# Altium PCB FingerprintLock.pcbdoc
Units mil, origin at the board's own origin, x right, y up, seen from the top; angles counter-clockwise.
Board outline 5450 x 3385 mil, 2 copper layers (Top Layer, Bottom Layer); 60 components, 58 nets, 310 pads, 332 vias.
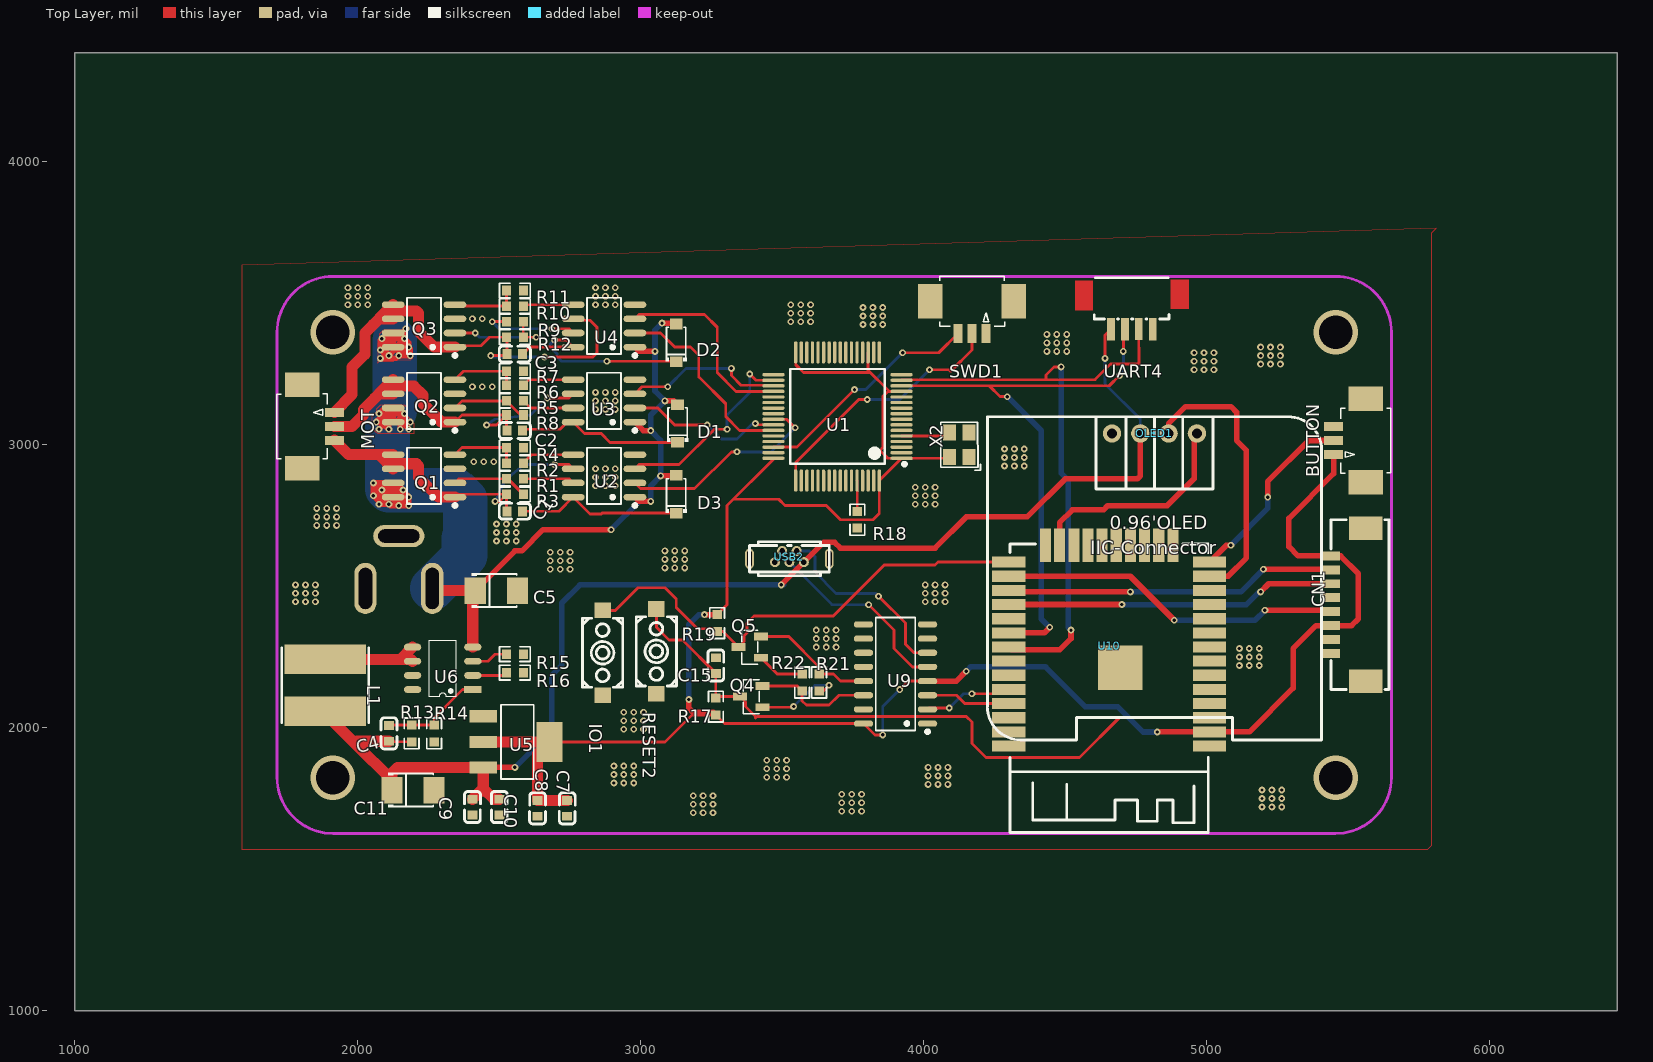
[diagram p0: Top Layer view]
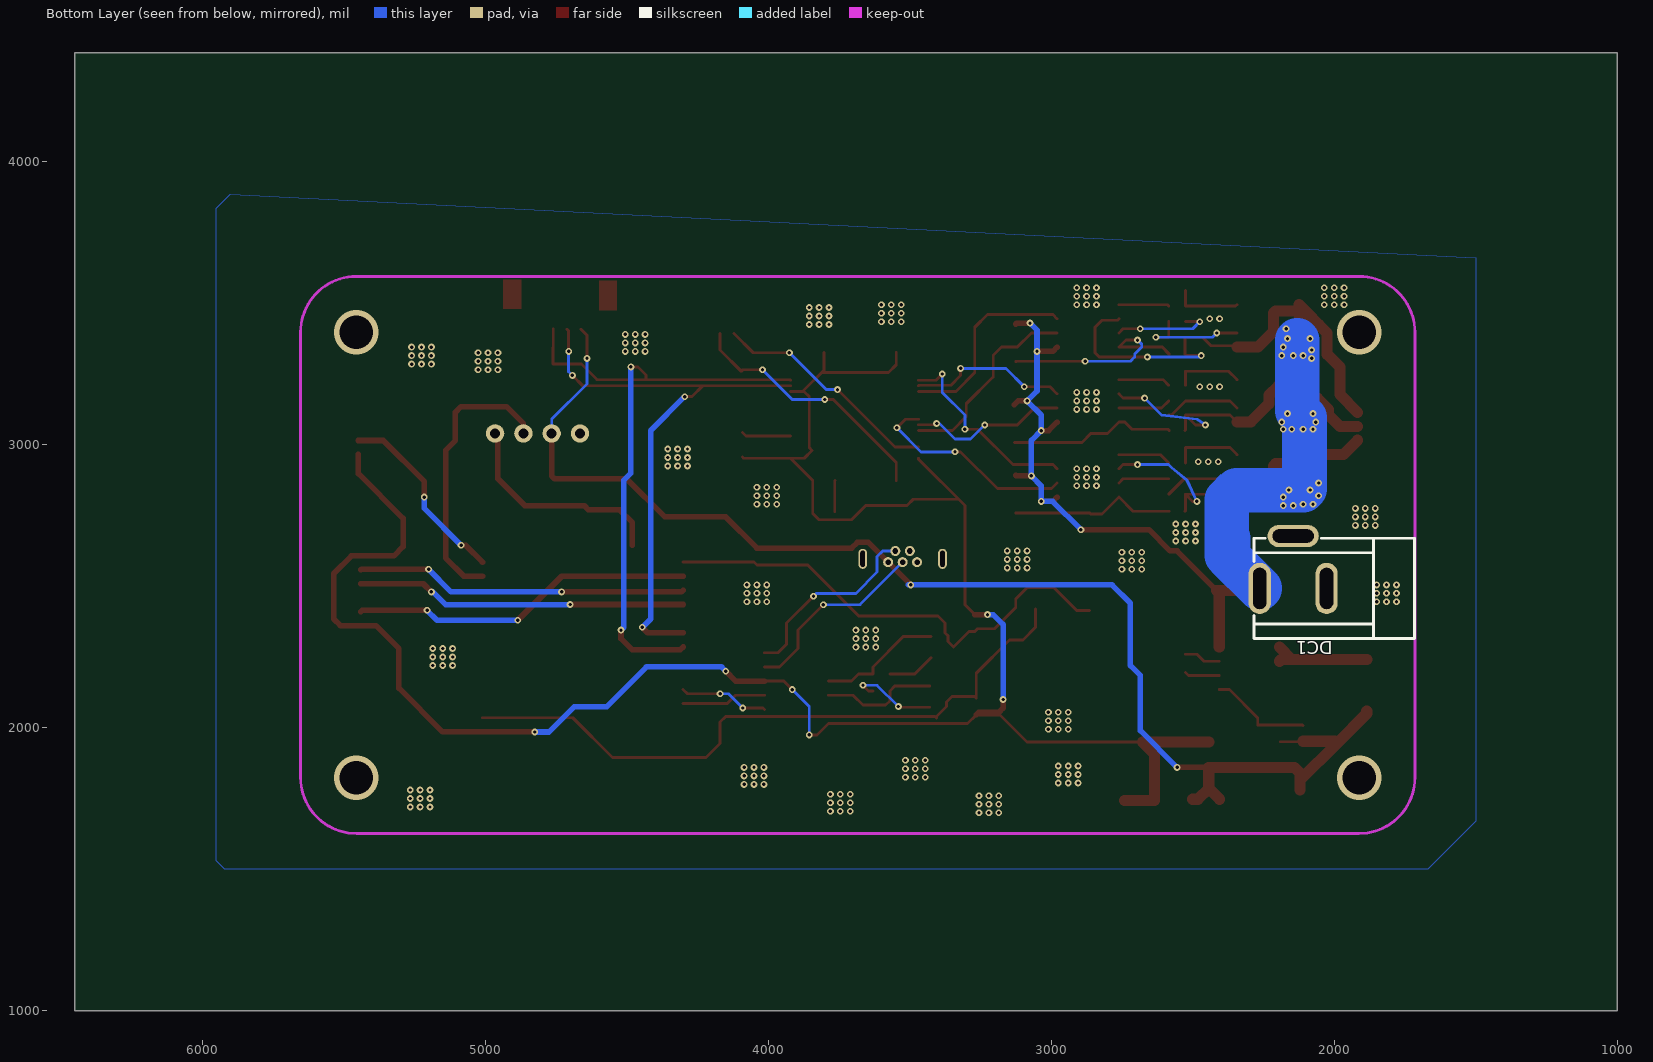
[diagram p1: Bottom Layer view, seen from below]

## Layer stack, top to bottom
Top Layer: signal copper (thickness not stored)
Dielectric: dielectric 12.6, FR-4, Dk 4.8
Bottom Layer: signal copper (thickness not stored)

## Board outline
6450,1000 1000,1000 1000,4385 6450,4385

## Components (designator, comment, footprint, x,y, rotation, side; value= is the part's Value field where it differs from the comment)
BUTTON "1.25T-3PWT" CONN-SMD_3P-P1.25_1.25T-3PWT 5505,3015 r270 top
C1 "22u" C0603 2555,2765 r0 top
C2 "22u" C0603 2555,3050 r0 top
C3 "22u" C0603 2555,3320 r0 top
C4 "200p" C0603 2110,1980 r270 top
C5 "100uF" CAP-SMD_L3.5-W2.8-R-RD 2490,2485 r180 top
C7 "22u" C0603 2740,1715 r270 top
C8 "0.1u" C0603 2635,1715 r270 top
C9 "22u" C0603 2405,1720 r270 top
C10 "0.1u" C0603 2500,1720 r270 top
C11 "220uF" CAP-SMD_L3.5-W2.8-R-RD 2195,1780 r180 top
C15 "1uf" C0603 3265,2220 r270 top
CN1 "1.25T-8P-WT_C2689920" CONN-SMD_1.25T-8P-WT_C2689920 5500,2435 r90 top
D1 "SS14D1F" SOD-123_L2.8-W1.8-LS3.7-RD 3130,3075 r90 top
D2 "SS14D1F" SOD-123_L2.8-W1.8-LS3.7-RD 3125,3360 r90 top
D3 "SS14D1F" SOD-123_L2.8-W1.8-LS3.7-RD 3125,2825 r90 top
DC1 "DC005-T" DC-IN-TH_DC005-T 2145,2585 r180 bottom
IO1 "K2-3.6×6.1_SMD" KEY-SMD_2P-L6.2-W3.6-LS8.0 2865,2265 r270 top
L1 "47uH" IND-SMD_L6.7-W6.7 1885,2150 r270 top
MOT "1.25T-3PWT" CONN-SMD_3P-P1.25_1.25T-3PWT 1860,3065 r90 top
OLED1 "0.96OLED_4P" 0.96OLED_4P 4815,3040 r0 top
Q1 "IRF7351TRPBF" SOIC-8_L4.9-W3.9-P1.27-LS6.0-BL 2234.03,2890 r90 top
Q2 "IRF7351TRPBF" SOIC-8_L4.9-W3.9-P1.27-LS6.0-BL 2234.03,3155 r90 top
Q3 "IRF7351TRPBF" SOIC-8_L4.9-W3.9-P1.27-LS6.0-BL 2234.03,3420 r90 top
Q4 "MMUN2233LT1G" SOT-23-3_L2.9-W1.3-P1.90-LS2.4-BR 3390,2110 r0 top
Q5 "MMUN2233LT1G" SOT-23-3_L2.9-W1.3-P1.90-LS2.4-BR 3385,2285 r0 top
R1 "7.5" R0603 2555,2880 r180 top
R2 "7.5" R0603 2555,2935 r180 top
R3 "10k" R0603 2555,2825 r180 top
R4 "10k" R0603 2555,2990 r180 top
R5 "7.5" R0603 2555,3155 r180 top
R6 "7.5" R0603 2555,3210 r180 top
R7 "10k" R0603 2555,3260 r180 top
R8 "10k" R0603 2555,3105 r180 top
R9 "7.5" R0603 2555,3435 r0 top
R10 "7.5" R0603 2555,3490 r180 top
R11 "10k" R0603 2555,3545 r180 top
R12 "10k" R0603 2555,3380 r180 top
R13 "470k" R0603 2190,1980 r270 top
R14 "150k" R0603 2270,1980 r90 top
R15 "62k" R0603 2555,2260 r180 top
R16 "130k" R0603 2555,2195 r180 top
R17 "1k" R0603 3265,2075 r90 top
R18 "1k" R0603 3765,2735 r90 top
R19 "1k" R0603 3270,2370 r90 top
R21 "10K" R0603 3630,2160 r270 top
R22 "10K" R0603 3570,2160 r90 top
RESET2 "K2-3.6×6.1_SMD" KEY-SMD_2P-L6.2-W3.6-LS8.0 3055,2270 r270 top
SWD1 "1.25T-3PWT" CONN-SMD_3P-P1.25_1.25T-3PWT 4170,3450 r0 top
U1 "STM32F405RGT6" LQFP-64_L10.0-W10.0-P0.50-LS12.0-BL 3695,3100 r90 top
U2 "IR2108STRPBF" SOIC-8_L4.9-W3.9-P1.27-LS6.0-BL 2870,2890 r90 top
U3 "IR2108STRPBF" SOIC-8_L4.9-W3.9-P1.27-LS6.0-BL 2870,3155 r90 top
U4 "IR2108STRPBF" SOIC-8_L4.9-W3.9-P1.27-LS6.0-BL 2870,3420 r90 top
U5 "AMS1117-3.3" SOT-223-3_L6.5-W3.4-P2.30-LS7.0-BR 2560,1950 r180 top
U6 "HX1314G" SOP8 2300,2210 r90 top
U9 "CH340C" SOP-16_L10.0-W3.9-P1.27-LS6.0-BL 3900,2190 r90 top
U10 "ESP32-S" WIRELM-SMD_ESP32-S 4655,2290 r180 top
UART4 "1.25T-4P-WT" CONN-SMD_4P-1.25P_1.25T-4P 4735,3470 r0 top
USB2 "U-D-M5DD-W-1" MICRO-USB-TH_MICRO-USB-A14 3525,2605 r180 top
X2 "8MHz" OSC-SMD_4P-L3.2-W2.5-BL 4125,3000 r90 top

## Footprints (in the part's own frame and the unit in brackets; to place one, negate y for a bottom-side part, rotate by r counter-clockwise, add the part's x,y. Pads: shape width x height; smd on the part's side, far side on the other; paste and mask are expansions set on the pad)
0.96OLED_4P [mm]
  round 1.65 hole 0.89: 1(-3.81,-0.001) 2(-1.27,0.002) 3(1.27,0.002) 4(3.81,0.002)
  silkscreen extent -15,-27.5 15,1.5
C0603 [mm]
  rect 0.8x0.9 smd: 1(-0.7,0) 2(0.7,0)
  silkscreen extent -1.41,-0.71 1.39,0.72
CAP-SMD_L3.5-W2.8-R-RD [mm]
  rect 1.9x2.376 smd: 1(1.899,0) 2(-1.899,0)
  silkscreen extent -1.83,-1.55 2.21,1.55
CONN-SMD_1.25T-8P-WT_C2689920 [mm]
  rect 0.8x1.6 smd: 1(4.375,1.55) 2(3.125,1.55) 3(1.875,1.55) 4(0.625,1.55) 5(-0.625,1.55) 6(-1.875,1.55) 7(-3.125,1.55) 8(-4.375,1.55)
  rect 2.1x3 smd: 9(-6.875,-1.55) 10(6.875,-1.55)
  silkscreen extent -7.62,-3.65 7.63,1.55
CONN-SMD_3P-P1.25_1.25T-3PWT [mm]
  rect 0.8x1.7 smd: 1(1.25,-1.45) 2(0,-1.45) 3(-1.25,-1.45)
  rect 2.2x3.1 smd: 4(-3.75,1.45) 5(3.75,1.45)
  silkscreen extent -2.9,-0.81 2.94,3.7
CONN-SMD_4P-1.25P_1.25T-4P [mm]
  rect 0.7x2 smd: 1(-1.875,-1.571) 2(-0.625,-1.571) 3(0.625,-1.556) 4(1.875,-1.574)
  round 0 smd: 5(4.3,1.574) 6(-4.3,1.463)
  Top Layer region: 5.1,0.264 3.5,0.264 3.5,2.884 5.1,2.884
  Top Layer region: -5.1,2.773 -3.5,2.773 -3.5,0.153 -5.1,0.153
  silkscreen extent -3.37,-0.64 3.34,3.06
DC-IN-TH_DC005-T [mm]
  oval 2x4.6 hole 1.2 slot 3.7 at 90 deg: 1(-3,-2.35) 2(3,-2.35)
  oval 4.6x2 hole 1.2 slot 3.7 at 0 deg: 3(0,2.35)
  silkscreen extent -3.5,-6.85 10.9,2.15
IND-SMD_L6.7-W6.7 [mm]
  rect 2.65x7.3 smd: 1(-2.325,0) 2(2.325,0)
  silkscreen extent -3.35,-3.9 3.35,3.9
KEY-SMD_2P-L6.2-W3.6-LS8.0 [mm]
  rect 1.4x1.5 smd: 1(-3.8,0) 2(3.8,0)
  silkscreen extent -3.1,-1.8 3.1,1.8
LQFP-64_L10.0-W10.0-P0.50-LS12.0-BL [mm]
  oval 0.3x2 smd: 1(-3.75,-5.75) 2(-3.25,-5.75) 3(-2.75,-5.75) 4(-2.25,-5.75) 5(-1.75,-5.75) 6(-1.25,-5.75) 7(-0.75,-5.75) 8(-0.25,-5.75) 9(0.25,-5.75) 10(0.75,-5.75) 11(1.25,-5.75) 12(1.75,-5.75) 13(2.25,-5.75) 14(2.75,-5.75) 15(3.25,-5.75) 16(3.75,-5.75) 33(3.75,5.75) 34(3.25,5.75) 35(2.75,5.75) 36(2.25,5.75) 37(1.75,5.75) 38(1.25,5.75) 39(0.75,5.75) 40(0.25,5.75) 41(-0.25,5.75) 42(-0.75,5.75) 43(-1.25,5.75) 44(-1.75,5.75) 45(-2.25,5.75) 46(-2.75,5.75) 47(-3.25,5.75) 48(-3.75,5.75)
  oval 2x0.3 smd: 17(5.75,-3.75) 18(5.75,-3.25) 19(5.75,-2.75) 20(5.75,-2.25) 21(5.75,-1.75) 22(5.75,-1.25) 23(5.75,-0.75) 24(5.75,-0.25) 25(5.75,0.25) 26(5.75,0.75) 27(5.75,1.25) 28(5.75,1.75) 29(5.75,2.25) 30(5.75,2.75) 31(5.75,3.25) 32(5.75,3.75) 49(-5.75,3.75) 50(-5.75,3.25) 51(-5.75,2.75) 52(-5.75,2.25) 53(-5.75,1.75) 54(-5.75,1.25) 55(-5.75,0.75) 56(-5.75,0.25) 57(-5.75,-0.25) 58(-5.75,-0.75) 59(-5.75,-1.25) 60(-5.75,-1.75) 61(-5.75,-2.25) 62(-5.75,-2.75) 63(-5.75,-3.25) 64(-5.75,-3.75)
  silkscreen extent -4.43,-6.16 4.25,4.25
MICRO-USB-TH_MICRO-USB-A14 [mm]
  round 0.9 hole 0.5: 1(-1.3,0.5) 2(-0.65,-0.5) 3(0,0.5) 4(0.65,-0.5) 5(1.3,0.5)
  oval 0.8x1.8 hole 0.4 slot 1.45 at 90 deg: 6(-3.58,0.201) 7(3.58,0.201)
  silkscreen extent -3.58,-1.32 3.58,1.72
OSC-SMD_4P-L3.2-W2.5-BL [mm]
  rect 1.4x1.2 smd: 1(-1.1,-0.875) 2(1.1,-0.875) 3(1.1,0.875) 4(-1.1,0.875)
  silkscreen extent -2.29,-1.9 2.03,1.65
R0603 [mil]
  rect 31.75x34.02 smd: 1(-29.66,0) 2(29.66,0)
  silkscreen extent -55,-26 55,26
SOD-123_L2.8-W1.8-LS3.7-RD [mm]
  rect 0.95x1.15 smd: 1(-1.693,0) 2(1.693,0)
  silkscreen extent -1.63,-0.94 1.41,0.94
SOIC-8_L4.9-W3.9-P1.27-LS6.0-BL [mm]
  oval 0.588x2.045 smd: 1(-1.905,-2.773) 2(-0.635,-2.773) 3(0.635,-2.773) 4(1.905,-2.773) 5(1.905,2.773) 6(0.635,2.773) 7(-0.635,2.773) 8(-1.905,2.773)
  silkscreen extent -2.8,-2.92 2.53,1.52
SOP8 [mil]
  rect 24x61 smd: 1(-75,-106.3)
  oval 24x61 smd: 2(-25,-106.3) 3(25,-106.3) 4(75,-106.3) 5(75,106.3) 6(25,106.3) 7(-25,106.3) 8(-75,106.3)
  silkscreen extent -100,-47 100,47
SOP-16_L10.0-W3.9-P1.27-LS6.0-BL [mm]
  oval 0.56x1.745 smd: 1(-4.445,-2.873) 2(-3.175,-2.873) 3(-1.905,-2.873) 4(-0.635,-2.873) 5(0.635,-2.873) 6(1.905,-2.873) 7(3.175,-2.873) 8(4.445,-2.873) 9(4.445,2.873) 10(3.175,2.873) 11(1.905,2.873) 12(0.635,2.873) 13(-0.635,2.873) 14(-1.905,2.873) 15(-3.175,2.873) 16(-4.445,2.873)
  silkscreen extent -5.33,-3.02 5.08,1.77
SOT-23-3_L2.9-W1.3-P1.90-LS2.4-BR [mm]
  rect 1.25x0.7 smd: 1(1,-0.95) 2(1,0.95) 3(-1,0)
  silkscreen extent -0.73,-1.53 0.73,1.53
SOT-223-3_L6.5-W3.4-P2.30-LS7.0-BR [mm]
  rect 2.5x1.1 smd: 1(2.97,-2.3) 2(2.97,0) 3(2.97,2.3)
  rect 2.34x3.6 smd: 4(-2.97,0)
  silkscreen extent -1.57,-3.33 1.37,3.33
WIRELM-SMD_ESP32-S [mm]
  rect 3x1 smd: 1(-9,9.005) 2(-9,7.735) 3(-9,6.465) 4(-9,5.195) 5(-9,3.925) 6(-9,2.655) 7(-9,1.385) 8(-9,0.115) 9(-9,-1.155) 10(-9,-2.425) 11(-9,-3.695) 12(-9,-4.965) 13(-9,-6.235) 14(-9,-7.505) 25(9,-7.505) 26(9,-6.235) 27(9,-4.965) 28(9,-3.695) 29(9,-2.425) 30(9,-1.155) 31(9,0.115) 32(9,1.385) 33(9,2.655) 34(9,3.925) 35(9,5.195) 36(9,6.465) 37(9,7.735) 38(9,9.005)
  rect 1x3 smd: 15(-5.715,-9.005) 16(-4.445,-9.005) 17(-3.175,-9.005) 18(-1.905,-9.005) 19(-0.635,-9.005) 20(0.635,-9.005) 21(1.905,-9.005) 22(3.175,-9.005) 23(4.445,-9.005) 24(5.715,-9.005)
  rect 4x4 smd: 39(-1,1.995)
  silkscreen extent -8.89,-9.13 8.89,16.78

## Via types
v1: diameter 24.02, hole 12.01, Top Layer to Bottom Layer, tented both sides, 328 vias
v2: diameter 157.48, hole 118.11, Top Layer to Bottom Layer, tented both sides, 4 vias

## Nets (pads, with @x,y where several pads share a name; then routed paths per layer and width w, separated by ;. In a path a pad name is that pad's centre, name@x,y a point inside that pad or via, vN(x,y) a via of type N, cw(c..) or ccw(c..) an arc to the next point about the centre after c; other vN are vias at no path point)
+3.3V: BUTTON.1 C7.1 C8.1 CN1.1 CN1.6 R17.1 R19.2 U1.1 U1.13 U1.19 U1.32 U1.48 U1.64 U5.2 U5.4 U9.4 U9.16 U10.2 X2.4 | length 7773.3
  Top Layer w10: U5.4 3085,1950 3180.35,2045.35 R17.1 3295.35,2015 U9.16 3826.91,1975 v1(3855,1975) ; R19.2 3305,2434.66 3305,2785 3468.63,2948.63 U1.48 ; 3327.5,2807.5 3487.5,2807.5 3510,2785 3655,2785 3705,2735 3820,2735 3842.64,2757.64 U1.64 U1.1 ; U1.32 3547.36,3282.64 3574.43,3255.57 3811.09,3255.57 ; U1.19 3803.27,3263.39 3878.08,3188.58 ; v1(3915,2135) 3945,2165 U9.4 ; U1.13 3873.58,3188.58 3855,3170 3855,2990 3845,2980 3872.64,2952.36 U1.1 ; X2.4@4090.55,2956.69 4086.22,2952.36 U1.1
  Top Layer w19.68: v1(3170,2100) 3170,2070 3185,2055 3255.35,2055 R17.1 ; v1(3225,2400) 3269.66,2400 R19.2 ; U9.4 4115,2165 v1(4150,2200) ; v1@4825,1985.47 U10.2 5150.47,1985.47 5305,2140 5305,2280 5386.18,2361.18 CN1.6 5511.18,2361.18 5535,2385 5535,2545 5472.75,2607.25 CN1.1 5322.41,2607.25 5289.66,2640 5289.66,2739.66 5447.91,2897.91 BUTTON.1
  Top Layer w39.37: U5.2 U5.4 2635,1908.07 C8.1 C7.1
  Bottom Layer w10: v1(3855,1975) 3855,2075 v1(3915,2135)
  Bottom Layer w19.68: v1(3170,2100) 3170,2365 3205,2400 v1(3225,2400) ; v1(4150,2200) 4165,2215 4430,2215 4570,2075 4685,2075 4775,1985 v1(4825,1985)
+5V: C4.2 C9.1 C10.1 C11.1 L1.2 OLED1.2 R13.2 U5.3 UART4.1 USB2.1 | length 4768.1
  Top Layer w10: C4.2 2112.1,1950.34 R13.2 ; v1(4640,3305) 4640,3386.96 UART4.1
  Top Layer w19.68: U5.3 2443.62,1860 v1(2555,1860) ; v1@3495,2505 v1(3495.9,2505) USB2.1 3645.9,2655 3685,2655 3705,2635 4040,2635 4150,2745 4365,2745 4500,2880 4755,2880 4765,2890 OLED1.2@4765,3040.05
  Top Layer w39.37: L1.2 1885,2050 1990,1945 ; C4.2 1997.44,1952.44 1990,1945 ; C9.1 2443.07,1785.63 ; C10.1 2481.14,1747.56 2443.07,1785.63 ; 1990,1945 2120.25,1814.75 2120.25,1780 2120.25,1839.7 2140,1859.45 U5.3 2443.07,1785.63
  Bottom Layer w10: v1(4640,3305) 4640,3215 4765,3090 OLED1.2@4765,3040.05
  Bottom Layer w19.68: v1(2555,1860) 2685,1990 2685,2185 2720,2220 2720,2440 2785,2505 v1@3505,2505
+12V: C5.1 D1.2 D2.2 D3.2 DC1.1 Q1.7 Q1.8 Q2.7 Q2.8 Q3.7 Q3.8 U2.1 U3.1 U4.1 U6.4 | length 6388.5
  Top Layer w19.68: 2063.55,2856.45 2068.69,2851.31 2124.88,2851.31 Q1.8 ; v1(2075,3055) 2100,3080 Q2.8 ; v1(2080,3305) 2135,3305 v1(2145,3315) ; 2081.91,3080 2106.91,3055 v1(2110,3055) 2110,3075 v1(2075,3110) ; v1(2085,2840) v1(2160,2840) ; 2089.41,2790 2089.41,2830.59 v1(2055,2865) ; 2104.91,2840 2104.91,2825.09 v1(2145,2785) ; 2109.41,2840 v1@2080,2840 ; 2109.76,3110 2095,3110 ; 2112.91,2840 v1@2080,2840 ; 2114.41,2840 2125,2840 v1(2180,2785) ; Q1.7 2149.88,2840 v1(2160,2840) ; Q3.8 Q3.7 ; 2134.55,2795.45 2169.55,2795.45 v1(2180,2785) ; 2141.91,2840 2141.91,2832.03 Q1.8 ; 2143.41,2840 2124.88,2821.47 Q1.8 ; v1(2150,3055) 2150,3095 v1(2165,3110) ; 2161.91,3315 2161.91,3401.91 v1(2170,3410) 2165,3405 v1(2165,3375) ; v1(2180,3055) 2165,3070 v1(2165,3110) ; C5.1@2415.25,2485 2555.25,2625 2580,2625 2655,2700 v1(2895,2700) ; U2.1 2994.15,2800 v1(3035,2800) ; U3.1 3009.15,3050 v1(3035,3050) ; U4.1 2994.15,3330 v1(3050,3330) ; v1(3070,2890) 3123.37,2890 D3.2 ; v1(3075,3430) 3121.63,3430 D2.2 ; v1(3085,3155) 3116.63,3155 D1.2 ; v1(2055,2820) v1(2055,2865) ; v1(2055,2820) 2075,2800 v1(2075,2790) v1(2110,2790) ; v1(2055,2820) v1(2055,2865) ; v1(2055,2865) v1@2080,2840 ; v1(2055,2865) v1@2080,2840 ; v1(2055,2865) 2075,2845 2075,2820 ; v1(2055,2865) 2055,2840 2075,2820 ; v1(2055,2865) 2135,2865 v1(2160,2840) ; 2075,2820 2080,2820 v1(2110,2790) ; v1(2075,3110) 2095,3130 Q2.7 Q2.8 ; v1(2075,3110) v1(2165,3110) ; v1(2080,3335) 2120,3375 v1(2165,3375) ; v1(2080,3335) v1@2100,3315 ; v1(2080,3335) 2080,3370 v1(2085,3375) ; v1(2085,3375) 2100,3360 v1@2100,3315 ; v1(2085,3375) v1(2165,3375) ; 2095,3110 Q2.8 ; 2095,3110 v1(2065,3080) 2135,3080 v1(2165,3110) ; v1@2100,3315 v1(2110,3315) 2140,3345 v1(2180,3345) ; v1(2110,2790) 2115,2785 v1(2145,2785) ; Q1.8 2150,2815 v1(2180,2785) ; v1(2145,2785) 2160,2800 v1(2160,2840) ; v1(2145,2785) v1(2180,2785) ; v1(2145,3315) 2145,3355 v1(2165,3375) ; v1(2145,3315) v1(2185,3315) 2185,3340 v1(2180,3345) ; v1(2160,2840) 2160,2835 v1(2180,2815) v1(2180,2785) ; v1(2165,3375) 2180,3360 v1(2180,3345)
  Top Layer w39.37: DC1.1 2270.57,2485 2415.25,2485 2406.3,2476.05 U6.4
  Bottom Layer w19.68: v1(2895,2700) 2995,2800 v1(3035,2800) 3035,2855 v1(3070,2890) 3070,3015 v1(3035,3050) 3035,3105 v1(3085,3155) 3050,3190 v1(3050,3330) 3050,3405 v1(3075,3430)
  Bottom Layer w157.48: 2130,3370 2130,3120 2105,3095 2105,2845 2110,2840 2345,2840 2380,2805 2380,2609.37 2375,2604.37 ; DC1.1 2375,2604.37 ; 2375,2670 2375,2604.37
  other v1: 2185,3080
AS608_RX: CN1.3 U10.28 | length 1168.9
  Top Layer w19.68: U10.28 v1(4700,2435.47) ; v1(5190,2480) 5218.82,2508.82 CN1.3
  Bottom Layer w19.68: v1(4700,2435.47) 5140,2435 5185,2480 v1(5190,2480)
AS608_TOUCH: CN1.5 U10.26 | length 1219.1
  Top Layer w19.68: U10.26 4729.53,2535.47 v1(4885,2380) ; v1(5205,2415) 5434.38,2415 CN1.5
  Bottom Layer w19.68: v1(4885,2380) 5170,2380 v1(5205,2415)
AS608_TX: CN1.2 U10.27 | length 1174.5
  Top Layer w19.68: U10.27 4306.14,2480 v1(4730,2480) ; v1(5200,2560) 5437.01,2560 CN1.2
  Bottom Layer w19.68: v1(4730,2480) 5120,2480 v1(5200,2560)
BUTTON: BUTTON.2 U10.14 | length 672.2
  Top Layer w19.68: U10.14 5068.86,2645 v1(5085,2645) ; v1(5215,2815) 5215,2870 5359.99,3014.99 BUTTON.2
  Bottom Layer w19.68: v1(5085,2645) 5215,2775 v1(5215,2815)
BUTTON_4: BUTTON.4
C1_2: C1.2 D3.1 U2.8 | length 589.4
  Top Layer w10: C1.2 2710.85,2765 U2.8 2820.85,2755 2860,2755 2863.37,2758.37 D3.1
CAN1_RX: U1.61
CAN1_TX: U1.62
D+: U9.5 USB2.3 | length 679.5
  Top Layer w10: v1(3805,2435) 3895,2345 3895,2280 3960,2215 U9.5
  Bottom Layer w10: USB2.3 3675.3,2435 v1(3805,2435)
D-: U9.6 USB2.2 | length 687.6
  Top Layer w10: v1(3840,2465) 3935,2370 3935,2345 3935,2295 3965,2265 U9.6
  Bottom Layer w10: USB2.2 3595.3,2624.7 3615,2605 3615,2550 3690,2475 3830,2475 v1(3840,2465)
DTR: Q5.2 R21.1 U9.13 | length 442.6
  Top Layer w10: Q5.2 3522.6,2322.4 3630,2215 R21.1 3680.35,2189.65 3705,2165 U9.13
EN: C15.2 Q4.3 R17.2 RESET2.1 U10.3 | length 2383.7
  Top Layer w10: RESET2.1 3055,2355 3100,2310 3147.44,2310 C15.2 R17.2 3270.34,2110 Q4.3 ; Q4.3 3370,2090.6 3370,2075 3405,2040 3405,2035 3410,2040 4150,2040 4170,2020 4170,1945 4220,1895 4550,1895 4690.5,2035.5 U10.3
ESP32-RX: U9.2 U10.34 | length 316.8
  Top Layer w10: U9.2 4018.09,2070 v1(4090,2070) ; v1(4170,2120) 4285.2,2120 U10.34
  Bottom Layer w10: v1(4090,2070) 4140,2120 v1(4170,2120)
ESP32-TX: U9.3 U10.35 | length 299.8
  Top Layer w10: U9.3 4115,2115 4144.53,2085.47 U10.35
GND: BUTTON.3 C5.2 C7.2 C8.2 C9.2 C10.2 C11.2 C15.1 CN1.4 DC1.2 DC1.3 IO1.2 OLED1.1 Q1.3 Q2.3 Q3.3 R4.1 R7.1 R11.1 R14.1 R15.1 R16.1 R18.1 RESET2.2 SWD1.1 U1.12 U1.18 U1.63 U2.4 U3.4 U4.4 U5.1 U6.7 U6.8 U9.1 U10.1 U10.15 U10.38 UART4.4 USB2.5 X2.2
  other v1: 3185,1700 3220,1700 3255,1700 3710,1705 3745,1705 3780,1705 5195,1720 5230,1720 5265,1720 3185,1730 3220,1730 3255,1730 3710,1735 3745,1735 3780,1735 5195,1750 5230,1750 5265,1750 3185,1760 3220,1760 3255,1760 3710,1765 3745,1765 3780,1765 5195,1780 5230,1780 5265,1780 4015,1800 4050,1800 4085,1800 2905,1805 2940,1805 2975,1805 3445,1825 3480,1825 3515,1825 4015,1830 4050,1830 4085,1830 2905,1835 2940,1835 2975,1835 3445,1855 3480,1855 3515,1855 4015,1860 4050,1860 4085,1860 2905,1865 2940,1865 2975,1865 3445,1885 3480,1885 3515,1885 2940,1995 2975,1995 3010,1995 2940,2025 2975,2025 3010,2025 2940,2055 2975,2055 3010,2055 5115,2220 5150,2220 5185,2220 5115,2250 5150,2250 5185,2250 5115,2280 5150,2280 5185,2280 3620,2285 3655,2285 3690,2285 3620,2315 3655,2315 3690,2315 3620,2345 3655,2345 3690,2345 1780,2445 1815,2445 1850,2445 4005,2445 4040,2445 4075,2445 1780,2475 1815,2475 1850,2475 4005,2475 4040,2475 4075,2475 1780,2505 1815,2505 1850,2505 4005,2505 4040,2505 4075,2505 2680,2560 2715,2560 2750,2560 3085,2565 3120,2565 3155,2565 2680,2590 2715,2590 2750,2590 3085,2595 3120,2595 3155,2595 2680,2620 2715,2620 2750,2620 3085,2625 3120,2625 3155,2625 2490,2660 2525,2660 2560,2660 2490,2690 2525,2690 2560,2690 1855,2715 1890,2715 1925,2715 2490,2720 2525,2720 2560,2720 1855,2745 1890,2745 1925,2745 1855,2775 1890,2775 1925,2775 3970,2790 4005,2790 4040,2790 3970,2820 4005,2820 4040,2820 3970,2850 4005,2850 4040,2850 2840,2855 2875,2855 2910,2855 2840,2885 2875,2885 2910,2885 2840,2915 2875,2915 2910,2915 4285,2925 4320,2925 4355,2925 2410,2940 2445,2940 2480,2940 4285,2955 4320,2955 4355,2955 4285,2985 4320,2985 4355,2985 2840,3125 2875,3125 2910,3125 2840,3155 2875,3155 2910,3155 2840,3185 2875,3185 2910,3185 2405,3205 2440,3205 2475,3205 4955,3265 4990,3265 5025,3265 5190,3285 5225,3285 5260,3285 4955,3295 4990,3295 5025,3295 5190,3315 5225,3315 5260,3315 4955,3325 4990,3325 5025,3325 4435,3330 4470,3330 4505,3330 5190,3345 5225,3345 5260,3345 4435,3360 4470,3360 4505,3360 4435,3390 4470,3390 4505,3390 3785,3425 3820,3425 3855,3425 3530,3435 3565,3435 3600,3435 2405,3445 2440,3445 3785,3455 3820,3455 3855,3455 3530,3465 3565,3465 3600,3465 3785,3485 3820,3485 3855,3485 1965,3495 2000,3495 2035,3495 2840,3495 2875,3495 2910,3495 3530,3495 3565,3495 3600,3495 1965,3525 2000,3525 2035,3525 2840,3525 2875,3525 2910,3525 1965,3555 2000,3555 2035,3555 2840,3555 2875,3555 2910,3555
IO0: IO1.1 Q5.3 R19.1 U10.25 | length 1730.6
  Top Layer w10: IO1.1 2909.6,2414.6 2990,2495 3085,2495 3125,2455 3125,2425 3200,2350 3260.35,2350 R19.1 3290.28,2340.35 Q5.3 3365,2304.37 3365,2325 3375,2335 3375,2370 3400,2395 3680,2395 3860,2575 4040,2575 4050.47,2585.47 U10.25
PWM1: U1.41 U2.2 | length 752.1
  Top Layer w10: U2.2 2999.15,2845 3065,2845 3190,2845 3320,2975 v1(3340,2975) ; U1.41 3514.84,3090.16 v1(3545,3060)
  Bottom Layer w10: v1(3340,2975) 3460,2975 v1(3545,3060)
PWM1N: U1.34 U2.3 | length 704.7
  Top Layer w10: U2.3 2994.15,2930 3135,2930 3260,3055 v1(3305,3055) ; v1(3385,3250) 3407.05,3227.95 U1.34@3468.63,3227.95
  Bottom Layer w10: v1(3305,3055) 3305,3105 3385,3185 v1(3385,3250)
PWM2: U1.42 U3.2 | length 559.7
  Top Layer w10: U3.2 3060,3130 3105,3085 3120,3070 v1(3235,3070) ; v1(3405,3075) 3409.53,3070.47 U1.42
  Bottom Layer w10: v1(3235,3070) 3285,3020 3340,3020 3395,3075 v1(3405,3075)
PWM2N: U1.35 U3.3 | length 566.9
  Top Layer w10: U3.3 3004.15,3205 v1(3095,3205) ; v1(3320,3270) 3320,3245 3355,3210 3466.9,3210 U1.35
  Bottom Layer w10: v1(3095,3205) 3160,3270 v1(3320,3270)
PWM3: U1.43 U4.2 | length 702.4
  Top Layer w10: U4.2 3070,3395 3120,3345 3175,3345 3205,3315 3205,3240 3300,3145 3300,3100 3349.21,3050.79 U1.43
PWM3N: U1.36 U4.3 | length 701.8
  Top Layer w10: U4.3 2994.2,3460 3225,3460 3270,3415 3270,3255 3336.4,3188.6 U1.36
R1_1: R1.1 U2.7 | length 182.4
  Top Layer w10: R1.1 2745.85,2880 U2.7
R1_2: Q1.2 R1.2 R3.1 | length 270.5
  Top Layer w10: Q1.2 2358.18,2880 R1.2 2529.66,2880 R3.1
R2_1: R2.1 U2.5 | length 188.6
  Top Layer w10: R2.1 2614.66,2965 U2.5
R2_2: Q1.4 R2.2 R4.2 | length 247.5
  Top Layer w10: Q1.4 2368.18,2990 R4.2 R2.2
R5_1: R5.1 U3.7 | length 186.5
  Top Layer w10: R5.1 2609.66,3130 U3.7
R5_2: Q2.2 R5.2 R8.1 | length 272.5
  Top Layer w10: Q2.2 2368.18,3155 R5.2 2575.34,3105 R8.1
R6_1: R6.1 U3.5 | length 184.5
  Top Layer w10: R6.1 2604.66,3230 U3.5
R6_2: Q2.4 R6.2 R7.2 | length 244.6
  Top Layer w10: Q2.4 2373.18,3260 R7.2 R6.2
R9_1: R9.1 U4.7 | length 352.8
  Top Layer w10: v1(2475,3435) R9.1 ; v1(2685,3410) 2745.85,3410 U4.7
  Bottom Layer w10: v1(2475,3435) 2500,3410 v1(2685,3410)
R9_2: Q3.2 R9.2 R12.1 | length 393.4
  Top Layer w10: Q3.2 v1(2415,3395) ; R9.2 R12.1 v1(2630,3380)
  Bottom Layer w10: v1(2415,3395) 2430,3380 v1(2630,3380)
R10_1: R10.1 U4.5 | length 178.3
  Top Layer w10: R10.1 2589.66,3495 U4.5
R10_2: Q3.4 R10.2 R11.2 | length 239.2
  Top Layer w10: Q3.4 2348.18,3490 R10.2 R11.2
R14_2: C4.1 R13.1 R14.2 U6.1 | length 363.9
  Top Layer w10: C4.1 2112.1,2009.66 R13.1 R14.2 2270,2035 2370,2135 U6.1
R15_2: R15.2 U6.3 | length 129.4
  Top Layer w10: U6.3 2460,2235 2485,2260 R15.2
R16_2: R16.2 U6.2 | length 123.2
  Top Layer w10: U6.2 2515.34,2185 R16.2
R18_2: R18.2 U1.60 | length 109.4
  Top Layer w10: U1.60 3765,2872.53 R18.2
R21_2: Q4.1 R21.2 | length 310.8
  Top Layer w10: Q4.1 3537.6,2072.6 v1(3540,2075) ; R21.2 3645.34,2130.34 v1(3665,2150)
  Bottom Layer w10: v1(3540,2075) 3615,2150 v1(3665,2150)
R22_2: Q5.1 R22.2 | length 169.6
  Top Layer w10: Q5.1 3482.31,2189.66 R22.2
RESET: U1.7
RTS: Q4.2 R22.1 U9.14 | length 420.7
  Top Layer w10: Q4.2 3552.95,2147.4 R22.1 3570,2095 3585,2080 3665,2080 3700,2115 U9.14
SCL: OLED1.3 U10.13 | length 995
  Top Layer w19.68: OLED1.3@4865,3040.05 4865,3075 4925,3135 5085,3135 5105,3115 5105,3015 5140,2980 5140,2600 5075.47,2535.47 U10.13
SDA: OLED1.4 U10.23 | length 783.9
  Top Layer w19.68: U10.23 4480,2725 4525,2770 4635,2770 4650,2785 4860,2785 4955,2880 4955,3030.05 OLED1.4@4965,3040.05
SWC: SWD1.2 U1.49 | length 918.2
  Top Layer w10: U1.49 3547.4,2937.4 3770,3160 v1@3805,3160 ; v1(4020,3265) 4090,3265 4095,3260 4170.01,3335.01 SWD1.2
  Bottom Layer w10: v1(3800,3160) 3915,3160 v1(4020,3265)
SWD: SWD1.3 U1.46 | length 818.3
  Top Layer w10: U1.46 3551.73,2991.73 v1(3755,3195) ; v1(3925,3325) 4052.87,3325 SWD1.3
  Bottom Layer w10: v1(3755,3195) 3795,3195 v1(3925,3325)
U: C1.1 MOT.3 Q1.1 Q1.5 Q1.6 R3.2 U2.6 | length 1301.3
  Top Layer w10: Q1.1 2353.18,2825 R3.2 ; v1(2485,2800) 2500.34,2800 R3.2 ; C1.1 2525.34,2767.1 R3.2 ; v1(2695,2930) 2745.85,2930 U2.6
  Top Layer w39.37: MOT.3 1967.87,2965 Q1.5 ; 2029.36,2965 2074.88,2965 Q1.6 ; 2107.11,2932.77 2207.23,2932.77 2215,2925 2215,2885 2285,2815 Q1.1
  Bottom Layer w10: v1(2485,2800) 2520,2875 2575,2920 2585,2930 v1(2695,2930)
U3_8: C2.2 D1.1 U3.8 | length 589.5
  Top Layer w10: C2.2 2587.56,3055 2715,3055 2740,3080 U3.8 2800.85,3040 2860,3040 2891.63,3008.37 D1.1
U4_8: C3.2 D2.1 U4.8 | length 768.3
  Top Layer w10: C3.2 2607.56,3345 U4.8 2735.85,3370 v1(2695,3370) ; v1(2880,3295) 3123.37,3295 D2.1
  Bottom Layer w10: v1(2695,3370) 2680,3355 2680,3345 2705,3320 2705,3310 2720,3295 v1(2880,3295)
U6_5: L1.1 U6.5 U6.6 | length 638.1
  Top Layer w39.37: U6.6 2187.16,2241.54 L1.1 2150.24,2241.54 U6.5
UART4_RX: U1.15 U10.31 UART4.3 | length 2282.4
  Top Layer w10: U1.15@3921.4,3227.9 3923.4,3230 4605,3230 4660,3285 4760,3285 UART4.3 ; 4431.9,3230 4431.9,3246.9 4460,3275 v1(4485,3275)
  Top Layer w19.68: U10.31 4311.14,2275 4480,2275 4520,2315 v1(4520,2345)
  Bottom Layer w19.68: v1(4485,3275) 4485,2900 4510,2875 4510,2355 v1(4520,2345)
UART4_TX: U1.14 U10.30 UART4.2 | length 2069
  Top Layer w10: U1.14 4655,3208.27 v1(4691.73,3245) v1@4695,3245 ; 4231.14,3208.27 4269.41,3170 v1(4295,3170) ; v1(4705,3330) 4705,3402.75 UART4.2
  Top Layer w19.68: U10.30 4425.47,2335.47 v1(4445,2355)
  Bottom Layer w10: v1(4691.73,3245) 4705,3258.27 v1(4705,3330)
  Bottom Layer w19.68: v1(4295,3170) 4415,3050 4415,2385 v1(4445,2355)
V: C2.1 MOT.2 Q2.1 Q2.5 Q2.6 R8.2 U3.6 | length 1347.4
  Top Layer w10: Q2.1 2368.18,3105 R8.2 ; v1(2455,3070) 2490.34,3070 R8.2 ; C2.1 2525.34,3052.1 R8.2 ; v1(2670,3165) 2745.85,3165 U3.6
  Top Layer w39.37: MOT.2 1980.01,3065.01 2020,3105 2020,3125.12 Q2.5 ; 2059.92,3165.04 2074.88,3180 Q2.6 ; 2102.34,3207.46 2197.54,3207.46 2230,3175 2230,3145 2295,3080 Q2.1
  Bottom Layer w10: v1(2455,3070) 2485,3090 2610,3105 v1(2670,3165)
W: C3.1 MOT.1 Q3.1 Q3.5 Q3.6 R12.2 U4.6 | length 1764
  Top Layer w10: Q3.1 2348.18,3350 2435,3350 2465,3380 R12.2 2527.44,3377.9 C3.1 2522.44,3315 v1(2470,3315) ; v1(2660,3310) 2830,3310 2845,3325 2845,3415 2820,3440 2765.8,3440 U4.6
  Top Layer w39.37: MOT.1 1980,3177.1 1980,3275 2025,3320 2025,3395 Q3.5 ; 2054.79,3424.82 2074.97,3445 Q3.6 ; 2102.21,3472.29 2207.71,3472.29 2215,3465 2215,3400 2270,3345 Q3.1
  Bottom Layer w10: v1(2470,3315) 2475,3310 v1(2660,3310)
X2_3: U1.5 X2.3 | length 174.2
  Top Layer w10: U1.5 4078.34,3031.1 X2.3@4090.55,3043.31
pads on no net: BUTTON.5 CN1.7 CN1.8 CN1.9 CN1.10 MOT.4 MOT.5 SWD1.4 SWD1.5 U1.2 U1.3 U1.4 U1.6 U1.8 U1.9 U1.10 U1.11 U1.16 U1.17 U1.20 U1.21 U1.22 U1.23 U1.24 U1.25 U1.26 U1.27 U1.28 U1.29 U1.30 U1.31 U1.33 U1.37 U1.38 U1.39 U1.40 U1.44 U1.45 U1.47 U1.50 U1.51 U1.52 U1.53 U1.54 U1.55 U1.56 U1.57 U1.58 U1.59 U9.7 U9.8 U9.9 U9.10 U9.11 U9.12 U9.15 U10.4 U10.5 U10.6 U10.7 U10.8 U10.9 U10.10 U10.11 U10.12 U10.16 U10.17 U10.18 U10.19 U10.20 U10.21 U10.22 U10.24 U10.29 U10.32 U10.33 U10.36 U10.37 U10.39 UART4.5 UART4.6 USB2.4 USB2.6 USB2.7 X2.1
copper on no net:
  other v2: 1911.85,1823.35 5455.16,1823.35 1911.85,3398.15 5455.16,3398.15

## Polygon pours and split planes (outlines as drawn)
+12V on Top Layer (solid): 2170,3410 2165,3405 2090,3405 2075,3390 2075,3360 2070,3355 2070,3320 2070,3290 2075,3295 2125,3295 2130,3300 2185,3300 2190,3305 2195,3305 2190,3310 2190,3345 2175,3360 2175,3375 2175,3410
+12V on Top Layer (solid): 2080,3140 2065,3125 2065,3115 2050,3100 2050,3085 2050,3060 2065,3045 2070,3040 2110,3040 2170,3040 2200,3040 2200,3075 2175,3100 2175,3130 2165,3140
GND on Top Layer (solid): 1590,3635 1590,1570 5780,1570 5795,1585 5795,3750 5810,3765
GND on Bottom Layer (solid): 1500,3660 1500,1670 1670,1500 5920,1500 5950,1530 5950,3835 5900,3885

## Keep-outs
Keep-Out Layer:
  lines w10: 1715,1823.35 ccw(c1911.85,1823.35) 1911.85,1626.5 ; 1715,3398.15 cw(c1911.85,3398.15) 1911.85,3595 ; 5455.16,1626.5 ccw(c5455.16,1823.35) 5652.01,1823.35 ; 5455.16,3595 cw(c5455.16,3398.15) 5652.01,3398.15

## Text inside footprints (layer, text, board x,y; h text height)
OLED1: Top Overlay "IIC-Connector" at 4588.4,2612.94 h47.24; Top Overlay "0.96'OLED" at 4657.6,2701.43 h47.24